# Altium PCB ControlBoard_v4.PcbDoc (part 1 of 2)
Units mm, origin at the board's own origin, x right, y up, seen from the top; angles counter-clockwise.
Board outline 111.5 x 182 mm, 2 copper layers (Top Layer, Bottom Layer); 154 components, 123 nets, 669 pads, 187 vias.
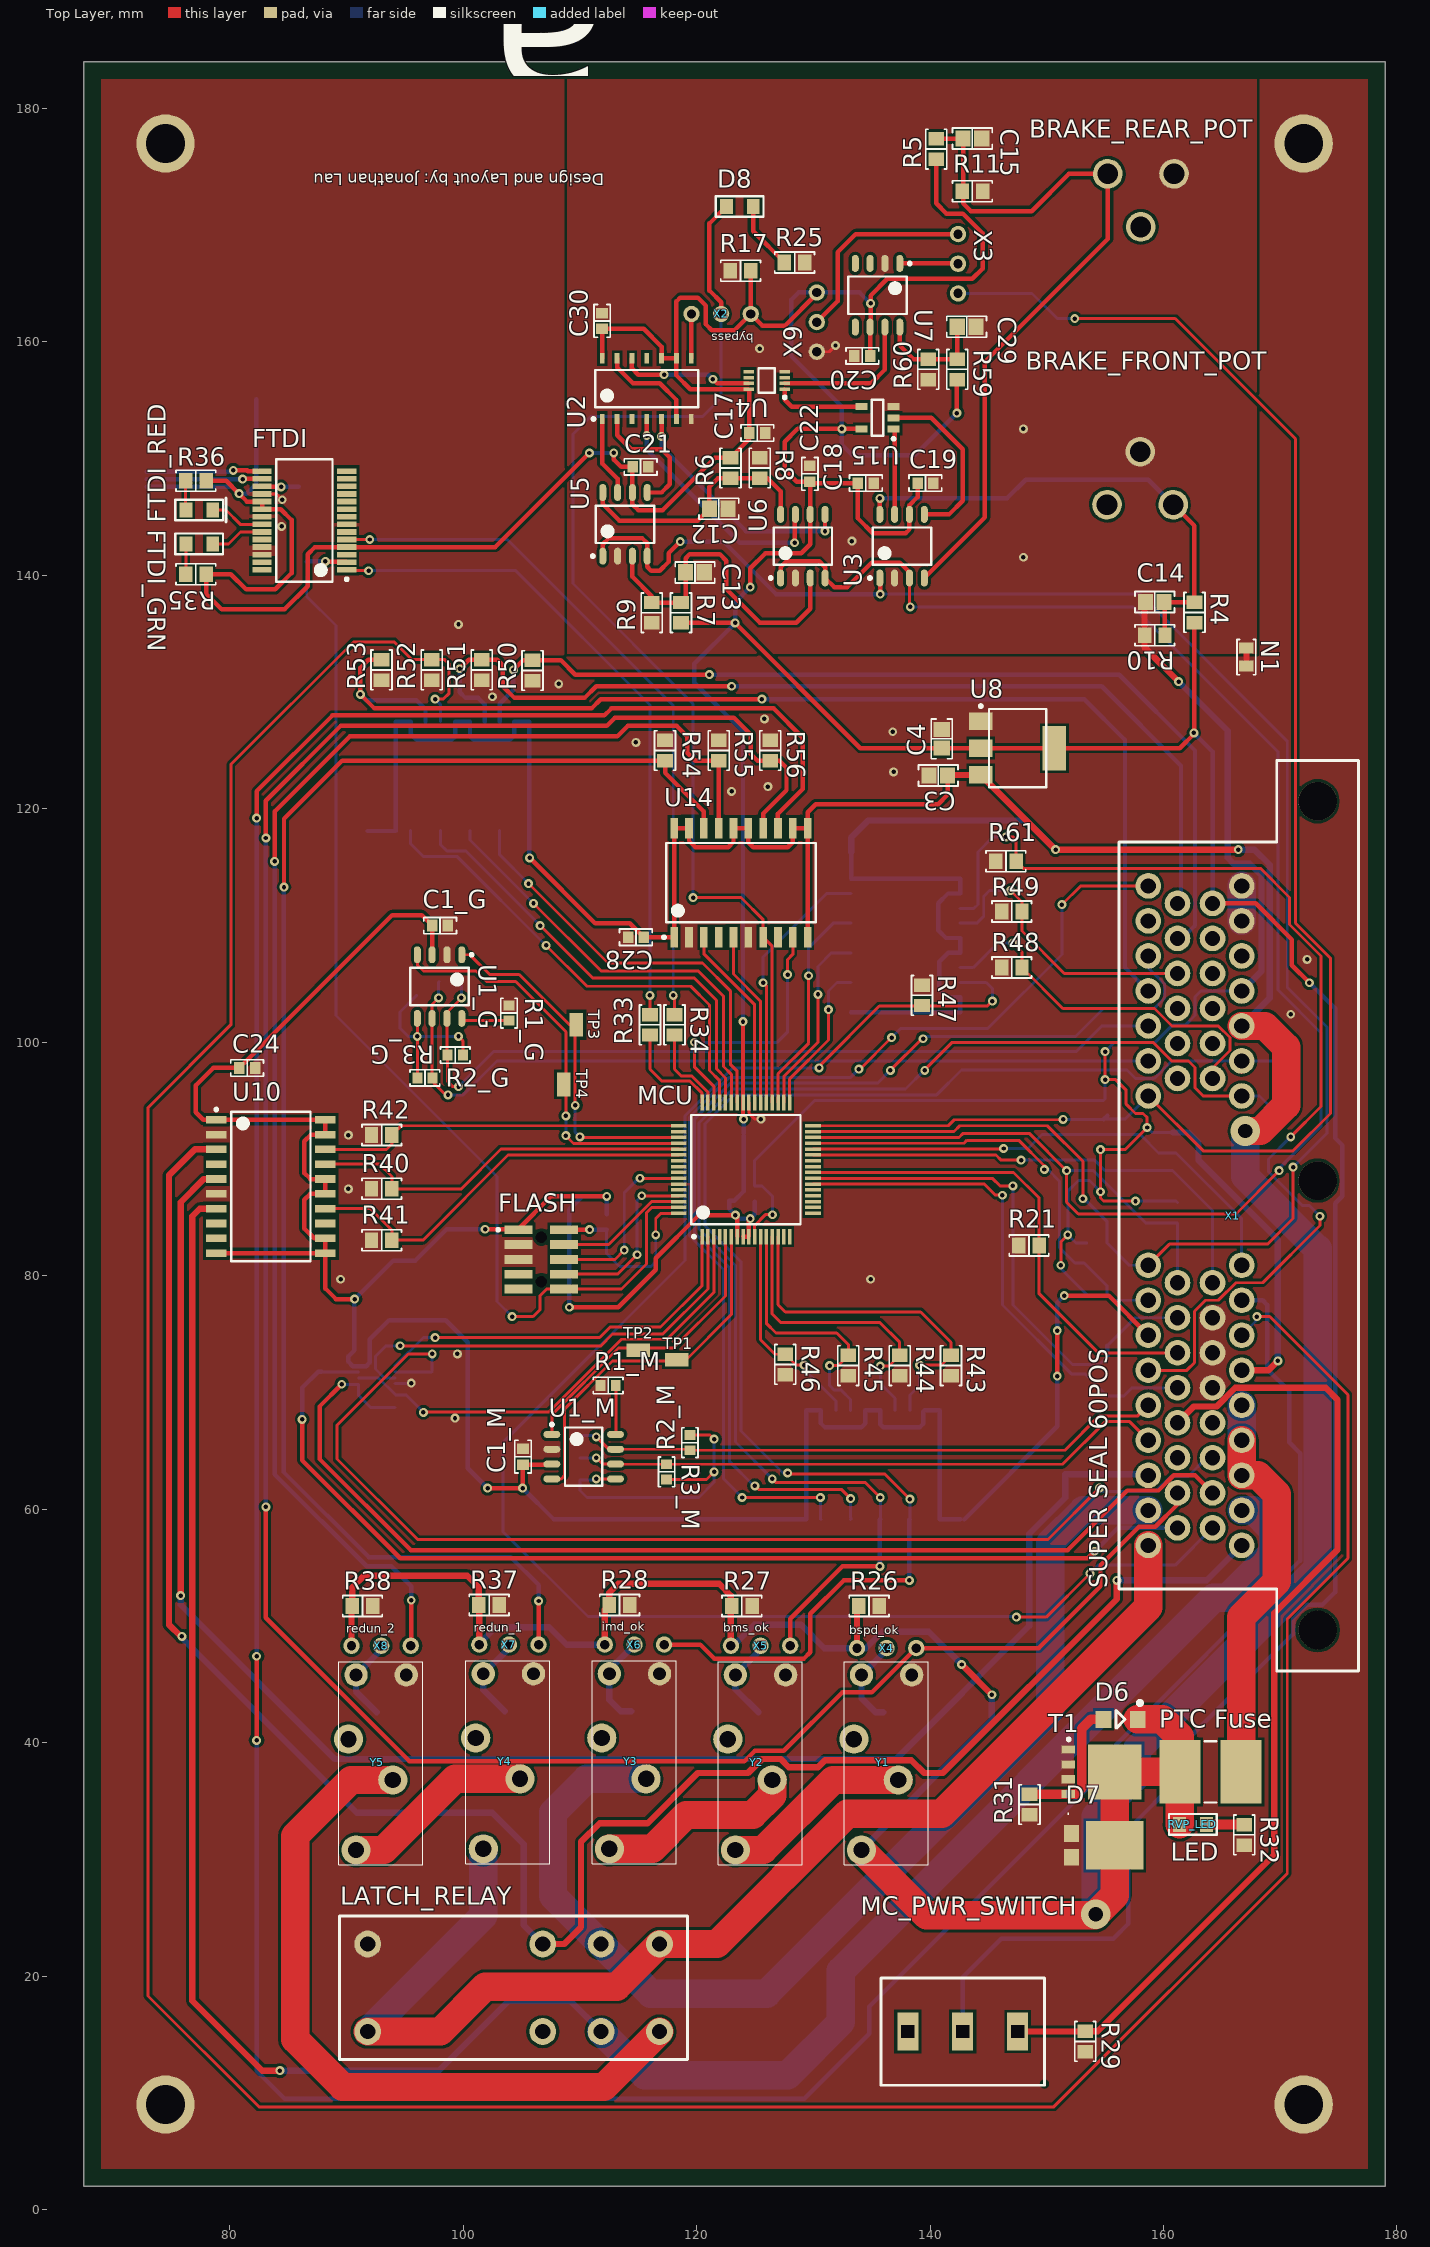
[diagram p0: Top Layer view]
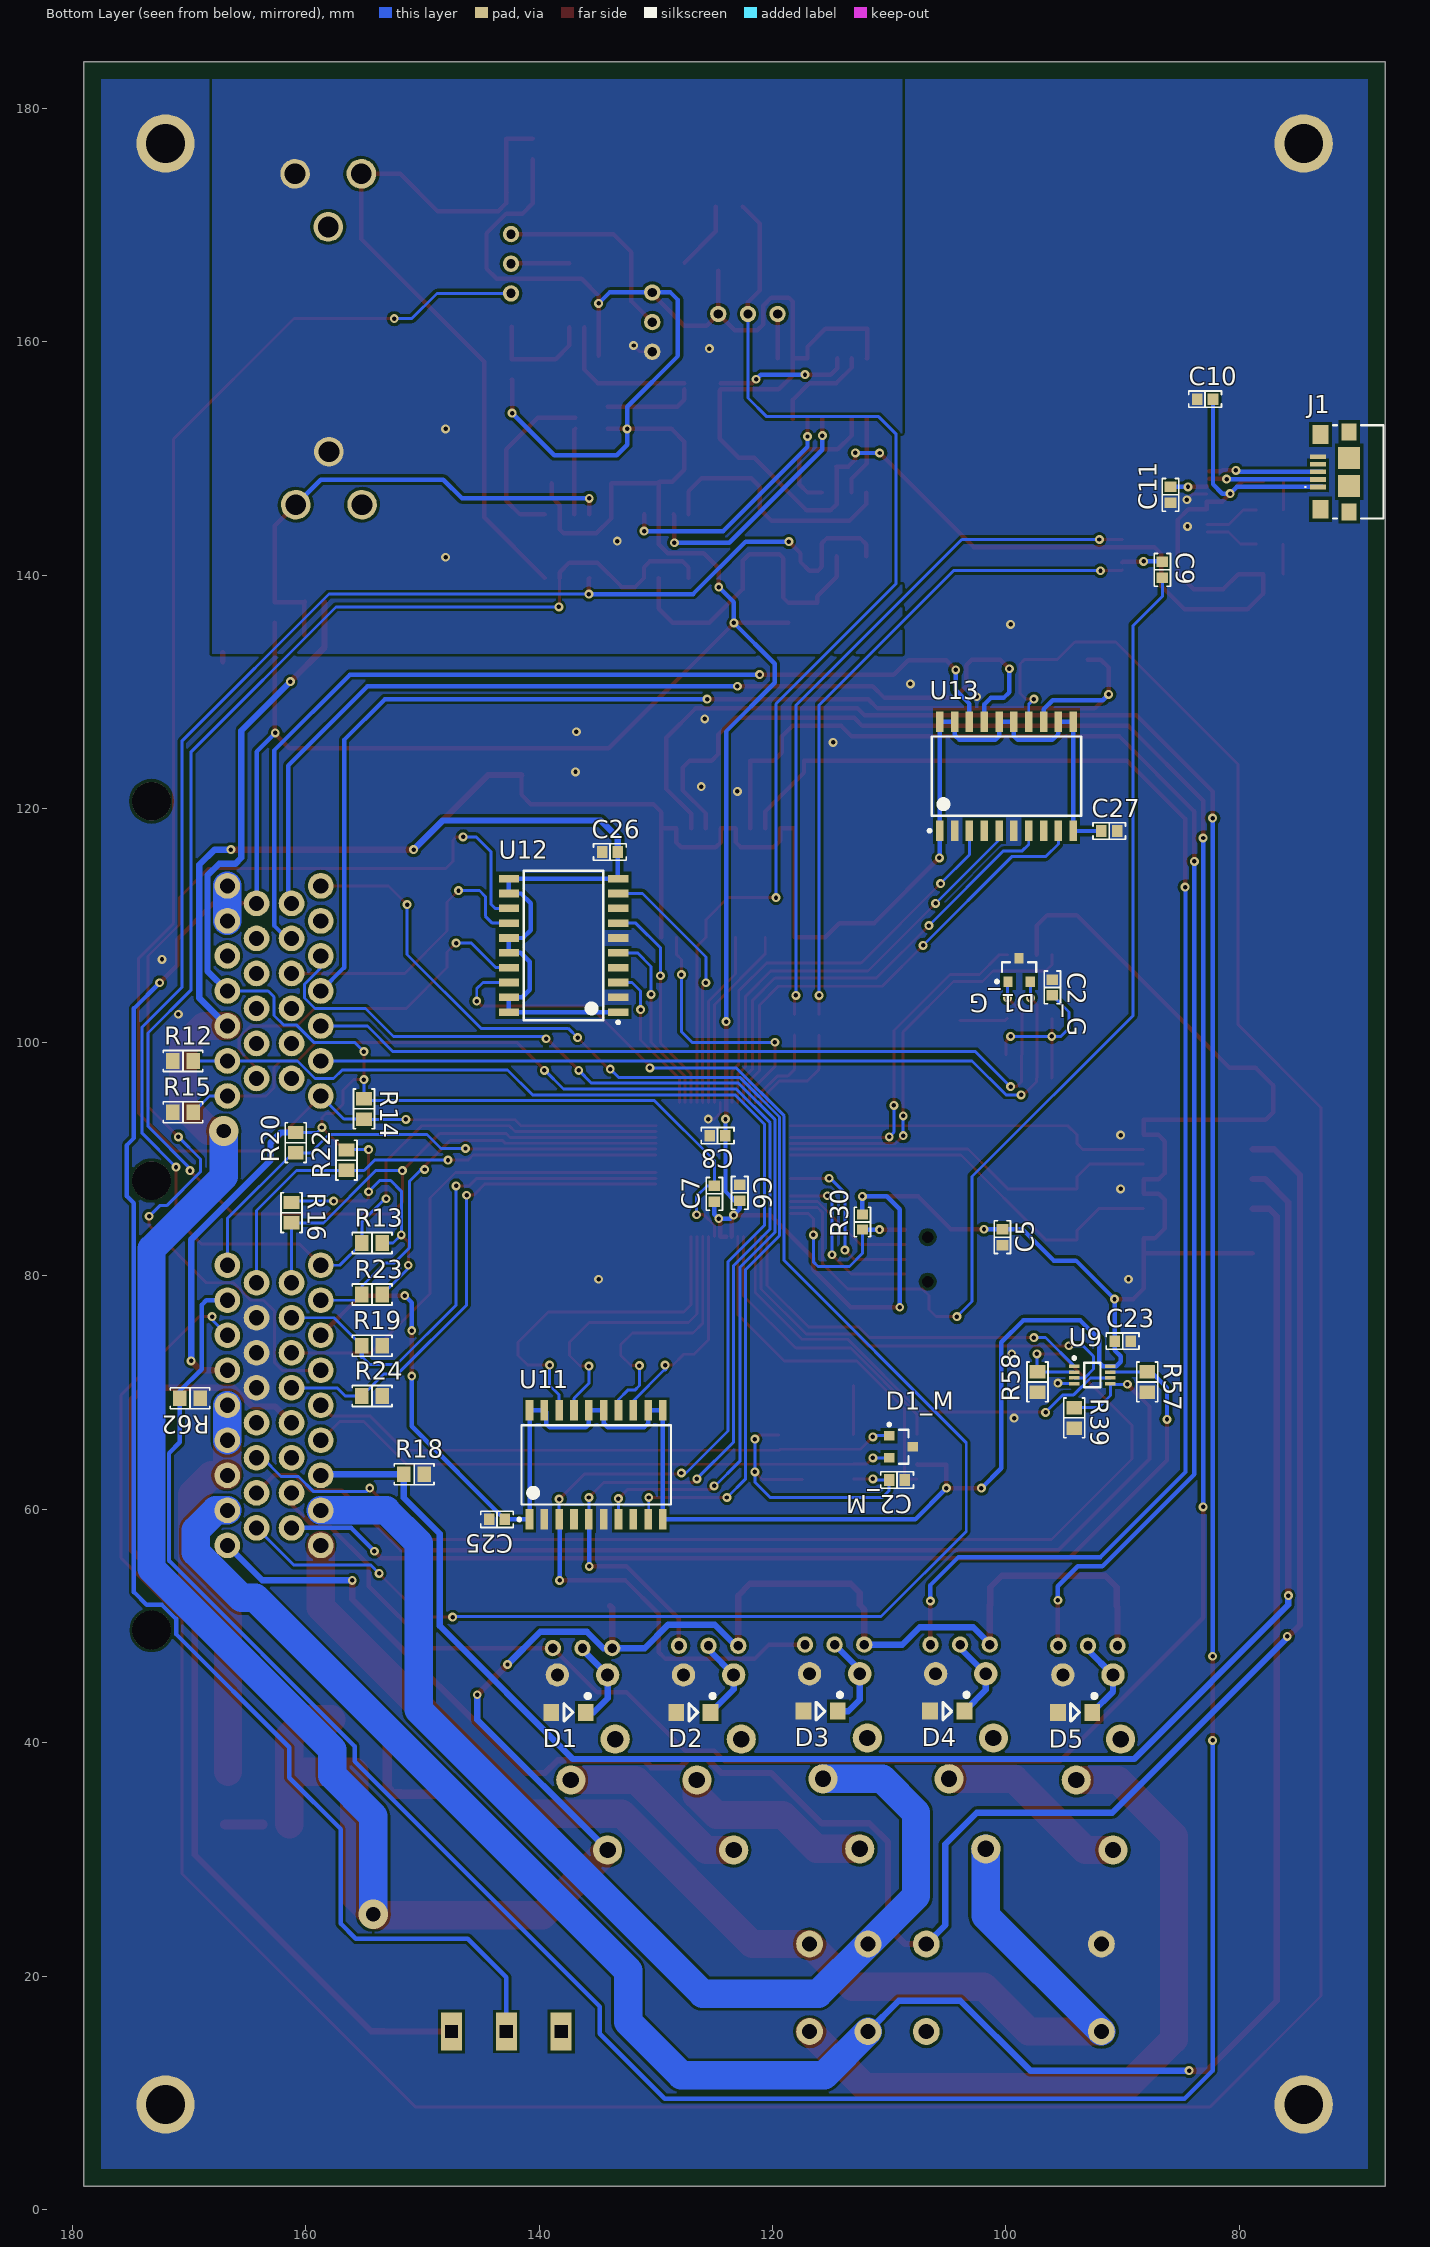
[diagram p1: Bottom Layer view, seen from below]
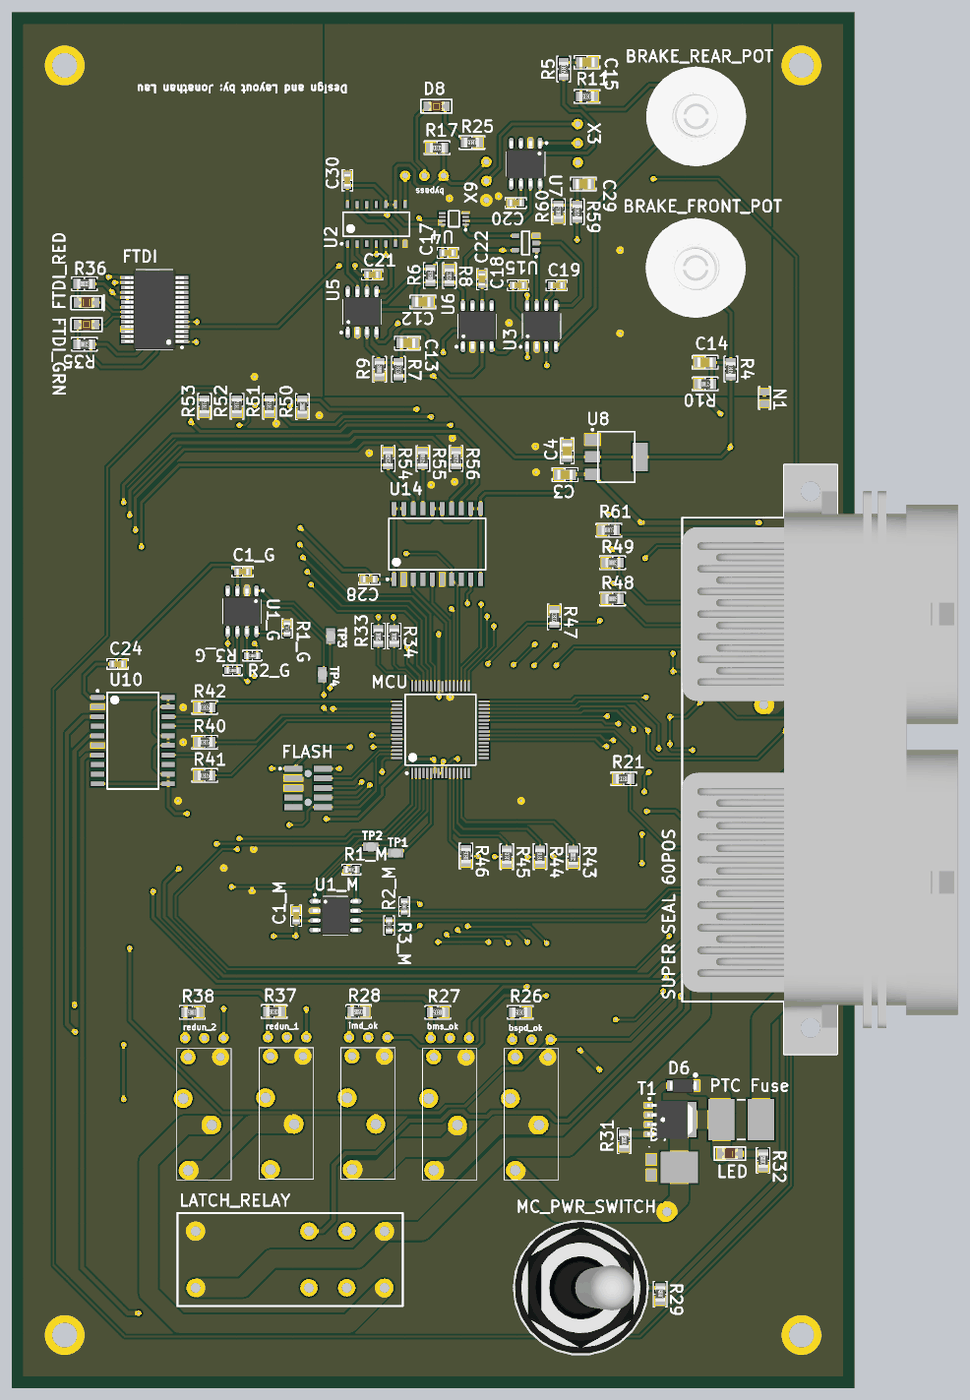
[diagram p3: 3D render of the assembled board from above, using the file's embedded part models]
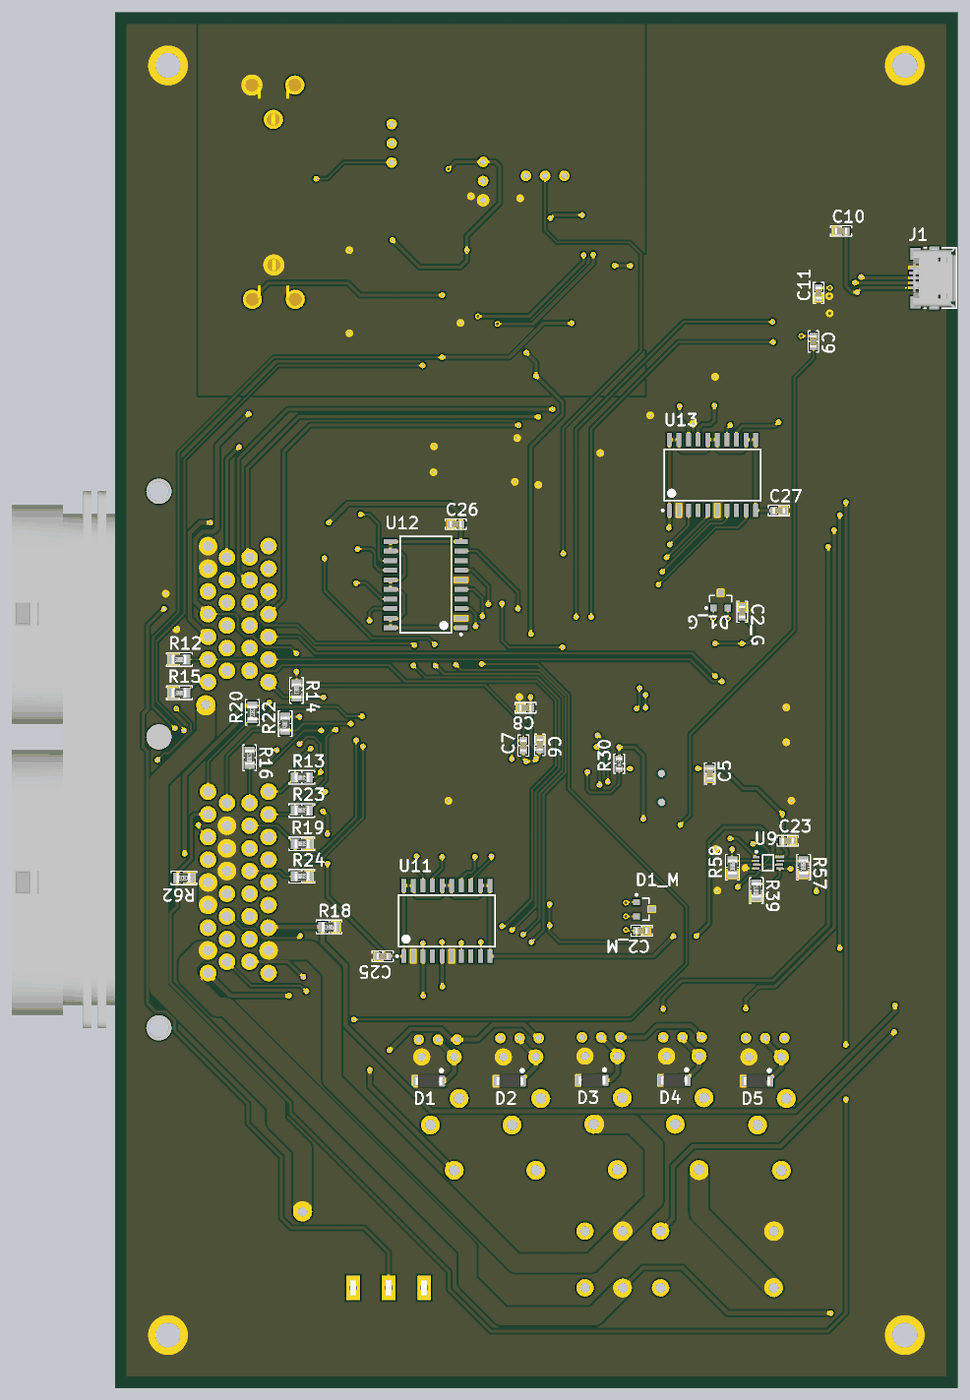
[diagram p4: 3D render of the assembled board from below, using the file's embedded part models]

## Layer stack, top to bottom
Top Solder: solder mask 0.0102, Solder Resist, Dk 3.5
Top Layer: signal copper 0.0356
Dielectric 1: dielectric 0.32, FR-4, Dk 4.8
Bottom Layer: signal copper 0.0356
Bottom Solder: solder mask 0.0102, Solder Resist, Dk 3.5

## Board outline
67.5,2 179,2 179,184 67.5,184

## Design rules (kind name [scope] priority, off if disabled: settings)
Clearance Clearance_12 [InNamedPolygon('AGND_TOP')] p1: gap=0.255 ignorepadtopadclearanceinfootprint=FALSE
Clearance Clearance_11 [InNamedPolygon('AGND_BOT')] p2: gap=0.255 ignorepadtopadclearanceinfootprint=FALSE
Clearance Clearance_10 [InNamedPolygon('AGND_TOP')] p3: gap=0.254 ignorepadtopadclearanceinfootprint=FALSE
Clearance Clearance_9 [InNamedPolygon('AGND_TOP')] p4: gap=0.254 ignorepadtopadclearanceinfootprint=FALSE except(0: Arc-Hole Track-Hole SMDPad-Hole THPad-Hole Via-Hole Fill-Hole Poly-Hole Region-Hole Text-Hole)
Clearance Clearance_8 [InNamedPolygon('AGND_BOT')] p5: gap=0.254 ignorepadtopadclearanceinfootprint=FALSE
Clearance Clearance_7 [InNamedPolygon('DGND_TOP')] p6: gap=0.254 ignorepadtopadclearanceinfootprint=FALSE
Clearance Clearance_6 [InNamedPolygon('DGND_BOT')] p7: gap=0.254 ignorepadtopadclearanceinfootprint=FALSE
Clearance Clearance_5 [InNamedPolygon('AGND_TOP')] p8: gap=0.254 ignorepadtopadclearanceinfootprint=FALSE
Clearance Clearance_4 [InNamedPolygon('AGND_BOT')] p9: gap=0.254 ignorepadtopadclearanceinfootprint=FALSE
Clearance Clearance_3 [InNamedPolygon('AGND_BOT')] p10: gap=0.254 ignorepadtopadclearanceinfootprint=FALSE except(0: Arc-Hole Track-Hole SMDPad-Hole THPad-Hole Via-Hole Fill-Hole Poly-Hole Region-Hole Text-Hole)
Clearance Clearance_2 [InNamedPolygon('AGND_BOT')] p11: gap=0.254 ignorepadtopadclearanceinfootprint=FALSE except(0: Arc-Hole Track-Hole SMDPad-Hole THPad-Hole Via-Hole Fill-Hole Poly-Hole Region-Hole Text-Hole)
Clearance Clearance_1 [InNamedPolygon('AGND_BOT')] p12: gap=0.254 ignorepadtopadclearanceinfootprint=FALSE except(0: Arc-Hole Track-Hole SMDPad-Hole THPad-Hole Via-Hole Fill-Hole Poly-Hole Region-Hole Text-Hole)
Clearance [InNetClass('All Nets')] p13: gap=0.006 ignorepadtopadclearanceinfootprint=FALSE
DiffPairsRouting [All] p1: maxlimit=0.254 minlimit=0.254 mostfreqgap=0.254 toplayer_minwidth=0.381 toplayer_maxwidth=0.381 toplayer_prefwidth=0.381 bottomlayer_minwidth=0.381 bottomlayer_maxwidth=0.381 bottomlayer_prefwidth=0.381 maxuncoupledlength=12.7
FabricationTestPointUsage TestPointUsage [All] p1: valid=0 allowmultiple=FALSE
FabricationTestpoint Testpoint [All] p1: side=3 testpointundercomponent=TRUE minsize=1.016 maxsize=2.54 preferedsize=1.524 minholesize=0.508 maxholesize=1.016 preferedholesize=0.813 testpointgrid=0.025 allowsidetop=TRUE allowsidebottom=TRUE usegrid=TRUE gridtolerance=0
Height [All] p1: minheight=0 maxheight=42 prefheight=12.7
HoleSize [All] p1: absolutevalues=TRUE maxlimit=6.274 minlimit=0.254 maxpercent=80.000 minpercent=20.000
PasteMaskExpansion PasteMaskExpansion_1 [InComponent('P1')] p1: expansion=-3.81
PasteMaskExpansion [All] p2: expansion=0
PlaneClearance [All] p1: clearance=0.543
PlaneConnect [All] p1: planeconnectstyle=Relief reliefexpansion=0.381 reliefentries=4 reliefconductorwidth=0.254 reliefairgap=0.254
PolygonConnect PolygonConnect_4 [All vs IsNamedPolygon('DGND_TOP')] p1: connectstyle=Direct reliefconductorwidth=0.254 reliefentries=4 polygonreliefangle="90 Angle" airgapwidth=0.254
PolygonConnect PolygonConnect_3 [All vs IsNamedPolygon('DGND_BOT')] p2: connectstyle=Direct reliefconductorwidth=0.254 reliefentries=4 polygonreliefangle="90 Angle" airgapwidth=0.254
PolygonConnect PolygonConnect_2 [All vs IsNamedPolygon('AGND_TOP')] p3: connectstyle=Direct reliefconductorwidth=0.254 reliefentries=4 polygonreliefangle="90 Angle" airgapwidth=0.254
PolygonConnect PolygonConnect_1 [All vs IsNamedPolygon('AGND_BOT')] p4: connectstyle=Direct reliefconductorwidth=0.254 reliefentries=4 polygonreliefangle="90 Angle" airgapwidth=0.254
PolygonConnect [All] p5: connectstyle=Relief reliefconductorwidth=0.254 reliefentries=4 polygonreliefangle="90 Angle" airgapwidth=0.254
RoutingVias [All] p1: holewidth=0.381 width=0.762 viastyle="Through Hole" minholewidth=0.254 minwidth=0.508 maxholewidth=2.55 maxwidth=2.55
SilkToSolderMaskClearance SilkscreenOverComponentPads [IsPad] p1: minsilkscreentomaskgap=0.254 clearancetoexposedcopper=TRUE
SolderMaskExpansion [All] p1: expansion=0.127
UnRoutedNet [All] p1: checkbadconnections=TRUE
Width [All] p1: maxlimit=3.81 minlimit=0.254 preferedwidth=0.254 minimp=50.000000 maximp=50.000000 favimp=50.000000
20 further rules are at their usual default settings.

## Classes and differential pairs
component class MCU_MKE185F512VLH16: C5 C6 C7 C8 FLASH MCU R30 TP1 TP2 TP3 TP4
component class MC_power_en: MC_PWR_SWITCH R29
component class LDO_5V: C3 C4 U8
component class Designator: D6 D7 "PTC Fuse" R31 R32 RVP_LED T1
component class Connector: R12 R13 R14 R15 R16 R18 R19 R20 R21 R22 R23 R24 X1
component class BSPD: BRAKE_FRONT_POT BRAKE_REAR_POT C12 C13 C14 C15 C17 C18 C19 C20 C21 C22 C29 C30 D8 R4 R5 R6 R7 R8 R9 R10 R11 R17 R25 R59 R60 U2 U3 U4 U5 U6 U7 U15 X2 X3 X9
component class 12V_out_driver: C26 C27 C28 R47 R48 R49 R50 R51 R52 R53 R54 R55 R56 R61 R62 U12 U13 U14
component class 5V_out_driver: C23 C24 C25 R39 R40 R41 R42 R43 R44 R45 R46 R57 R58 U9 U10 U11
channel class CAN_Tranceiver: GEN MC
component class USB: C9 C10 C11 FTDI FTDI_GRN FTDI_RED J1 R33 R34 R35 R36
component class MC: C1_M C2_M D1_M R1_M R2_M R3_M U1_M
component class GEN: C1_G C2_G D1_G R1_G R2_G R3_G U1_G
component class Shutdown: D1 D2 D3 D4 D5 LATCH_RELAY R26 R27 R28 R37 R38 X4 X5 X6 X7 X8 Y1 Y2 Y3 Y4 Y5
differential pair D: +D_P -D_N

## Components (designator, comment, footprint, x,y, rotation, side; value= is the part's Value field where it differs from the comment)
BRAKE_FRONT_POT "RV6LAYSA502A" RV6LAYSA502A 158,148.924 r0 top value="100-5M Ohms"
BRAKE_REAR_POT "RV6LAYSA502A" RV6LAYSA502A 158.06,171.531 r180 top value="100-5M Ohms"
C1_G "Capacitor MLCC 0.10uf 50V CAP 0603/1608" "CAP 0603/1608" 98.025,110 r180 top value=0.10uf (schematic designator C1)
C1_M "Capacitor MLCC 0.10uf 50V CAP 0603/1608" "CAP 0603/1608" 105.125,64.5 r270 top value=0.10uf (schematic designator C1)
C2_G "Capacitor MLCC 4700pf 50V CAP 0603/1608" "CAP 0603/1608" 96.025,104.7 r270 bottom value=4700pf (schematic designator C2)
C2_M "Capacitor MLCC 4700pf 50V CAP 0603/1608" "CAP 0603/1608" 109.325,62.5 r0 bottom value=4700pf (schematic designator C2)
C3 "Capacitor MLCC 10uf 16V CAP 0805/2012" "CAP 0805/2012" 140.7,122.855 r0 top value=10uf
C4 "Capacitor MLCC 10uf 16V CAP 0805/2012" "CAP 0805/2012" 141,126 r270 top value=10uf
C5 "Capacitor MLCC 0.10uf 16V CAP 0603/1608" "CAP 0603/1608" 100.3,83.305 r90 bottom value=0.10uf
C6 "Capacitor MLCC 0.10uf 25V CAP 0603/1608" "CAP 0603/1608" 122.8,87.1 r270 bottom value=0.10uf
C7 "Capacitor MLCC 0.10uf 25V CAP 0603/1608" "CAP 0603/1608" 124.975,87.015 r270 bottom value=0.10uf
C8 "Capacitor MLCC 100pf 25V CAP 0603/1608" "CAP 0603/1608" 124.7,92 r180 bottom value=100pf
C9 "Capacitor MLCC 0.10uf 25V CAP 0603/1608" "CAP 0603/1608" 86.6,140.475 r270 bottom value=0.10uf
C10 "Capacitor MLCC 0.10uf 25V CAP 0603/1608" "CAP 0603/1608" 82.935,155.1 r180 bottom value=0.10uf
C11 "Capacitor MLCC 0.10uf 25V CAP 0603/1608" "CAP 0603/1608" 85.9,146.9 r90 bottom value=0.10uf
C12 "Capacitor MLCC 0.10uf 16V CAP 0805/2012" "CAP 0805/2012" 121.9,145.7 r180 top value=0.10uf
C13 "Capacitor MLCC 0.10uf 16V CAP 0805/2012" "CAP 0805/2012" 119.86,140.255 r180 top value=0.10uf
C14 "Capacitor MLCC 0.10uf 16V CAP 0805/2012" "CAP 0805/2012" 159.25,137.724 r0 top value=0.10uf
C15 "Capacitor MLCC 0.10uf 16V CAP 0805/2012" "CAP 0805/2012" 143.625,177.425 r180 top value=0.10uf
C17 "Capacitor MLCC 1.0uf 16V CAP 0603/1608" "CAP 0603/1608" 125.2,152.2 r180 top value=1.0uf
C18 "Capacitor MLCC 1.0uf 16V CAP 0603/1608" "CAP 0603/1608" 134.5,147.9 r180 top value=1.0uf
C19 "Capacitor MLCC 1.0uf 16V CAP 0603/1608" "CAP 0603/1608" 139.6,147.9 r180 top value=1.0uf
C20 "Capacitor MLCC 1.0uf 16V CAP 0603/1608" "CAP 0603/1608" 134.2,158.8 r0 top value=1.0uf
C21 "Capacitor MLCC 1.0uf 16V CAP 0603/1608" "CAP 0603/1608" 115.2,149.3 r180 top value=1.0uf
C22 "Capacitor MLCC 1.0uf 16V CAP 0603/1608" "CAP 0603/1608" 129.7,148.7 r270 top value=1.0uf
C23 "Capacitor MLCC 1.0uf 16V CAP 0603/1608" "CAP 0603/1608" 90,74.4 r0 bottom value=1.0uf
C24 "Capacitor MLCC 10uf 16V CAP 0603/1608" "CAP 0603/1608" 81.5,97.8 r0 top value=10uf
C25 "Capacitor MLCC 10uf 16V CAP 0603/1608" "CAP 0603/1608" 143.6,59.125 r0 bottom value=10uf
C26 "Capacitor MLCC 10uf 16V CAP 0603/1608" "CAP 0603/1608" 133.925,116.3 r180 bottom value=10uf
C27 "Capacitor MLCC 10uf 16V CAP 0603/1608" "CAP 0603/1608" 91.15,118.1 r0 bottom value=10uf
C28 "Capacitor MLCC 10uf 16V CAP 0603/1608" "CAP 0603/1608" 114.8,109 r0 top value=10uf
C29 "Capacitor MLCC 0.10uf 16V CAP 0805/2012" "CAP 0805/2012" 143.135,161.31 r180 top value=0.10uf
C30 "Capacitor MLCC 1.0uf 16V CAP 0603/1608" "CAP 0603/1608" 111.9,161.8 r270 top value=1.0uf
D1 "DIODE" SOD123F 137.475,42.6 r180 bottom
D1_G "NUP1105LT1G" "SOT-23 (TO-236)" 98.875,106.2 r90 bottom value=TVS_24V (schematic designator D1)
D1_M "NUP1105LT1G" "SOT-23 (TO-236)" 109,65.35 r180 bottom value=TVS_24V (schematic designator D1)
D2 "DIODE" SOD123F 126.775,42.6 r180 bottom
D3 "DIODE" SOD123F 115.875,42.7 r180 bottom
D4 "DIODE" SOD123F 105.025,42.7 r180 bottom
D5 "DIODE" SOD123F 94.075,42.6 r180 bottom
D6 "DDZ9701-7" SOD123F 156.325,42 r0 top value=14Vz
D7 "DIODE_2A1K" TO-277 154.912,31.2 r0 top value="20 A"
D8 "LED" 0805_LED 123.7,171.6 r0 top value=Green
FLASH "CN-2P-M-R10" HDR2X5_SMT 106.7,81.4 r270 top value=CONN
FTDI "FT232RL" SSOP-28 86.4,144.7 r180 top
FTDI_GRN "LED" 0805_LED 77.4,142.7 r0 top value=Green (schematic designator GRN)
FTDI_RED "LED" 0805_LED 77.4,145.6 r0 top value=Red (schematic designator RED)
J1 "USB-5-6SHLD" TECO-1981568-5_V 73.275,148.87 r90 bottom value=CONN
LATCH_RELAY "JW2SN-DC12V-Relay" JW2SN-DC12V-Relay 104.375,19 r180 top
MC_PWR_SWITCH "SPST" M2011SS1W01/UC 142.8,15.25 r90 top
MCU "MKE18F512 VLH16 MCU" TQFP64 124.225,89.1 r90 top
N1 "Net_Tie" Net_Tie 167.1,132.997 r90 top
"PTC Fuse" "PTC Fuse" "PTC Fuse 2920/07351" 164.025,37.5 r180 top value="2A hold, 4A trip, 40A max"
R1_G "Resistor 100 0603 1/10W 10%" "RES 0603/1608" 103.925,102.5 r270 top value=100 (schematic designator R1)
R1_M "Resistor 100 0603 1/10W 10%" "RES 0603/1608" 112.425,70.6 r0 top value=100 (schematic designator R1)
R2_G "Resistor 62 0603 1/10W 5%" "RES 0603/1608" 96.725,96.95 r180 top value=62 (schematic designator R2)
R2_M "Resistor 62 0603 1/10W 5%" "RES 0603/1608" 117.425,63.2 r270 top value=62 (schematic designator R2)
R3_G "Resistor 62 0603 1/10W 5%" "RES 0603/1608" 99.325,98.9 r180 top value=62 (schematic designator R3)
R3_M "Resistor 62 0603 1/10W 5%" "RES 0603/1608" 119.425,65.7 r270 top value=62 (schematic designator R3)
R4 "Resistor 51k 0805 1/4W 5%" "RES 0805/2012" 162.65,136.824 r270 top value=51k
R5 "Resistor 51k 0805 1/4W 5%" "RES 0805/2012" 140.525,176.525 r270 top value=51k
R6 "Resistor 18k 0805 1/4W 5%" "RES 0805/2012" 122.9,149.2 r90 top value=18k
R7 "Resistor 2.0k 0805 1/4W 5%" "RES 0805/2012" 118.665,136.8 r270 top value=2.0k
R8 "Resistor 2.0k 0805 1/4W 5%" "RES 0805/2012" 125.4,149.2 r270 top value=2.0k
R9 "Resistor 18k 0805 1/4W 5%" "RES 0805/2012" 116.165,136.8 r90 top value=18k
R10 "Resistor 51k 0805 1/4W 5%" "RES 0805/2012" 159.25,134.874 r0 top value=51k
R11 "Resistor 51k 0805 1/4W 5%" "RES 0805/2012" 143.625,172.9 r180 top value=51k
R12 "Resistor 47k 0805 1/10W 1%" "RES 0805/2012" 170.5,98.4 r0 bottom value=47k
R13 "Resistor 47k 0805 1/10W 5%" "RES 0805/2012" 154.3,82.8 r180 bottom value=47k
R14 "Resistor 47k 0805 1/10W 5%" "RES 0805/2012" 155,94.3 r270 bottom value=47k
R15 "Resistor 47k 0805 1/10W 1%" "RES 0805/2012" 170.5,94 r0 bottom value=47k
R16 "Resistor 47k 0805 1/10W 5%" "RES 0805/2012" 161.2,85.4 r90 bottom value=47k
R17 "Resistor 47k 0805 1/4W 5%" "RES 0805/2012" 123.765,166.1 r0 top value=47k
R18 "Resistor 47k 0805 1/10W 1%" "RES 0805/2012" 150.7,63 r180 bottom value=47k
R19 "Resistor 47k 0805 1/10W 5%" "RES 0805/2012" 154.3,74 r180 bottom value=47k
R20 "Resistor 47k 0805 1/10W 5%" "RES 0805/2012" 160.84,91.4 r270 bottom value=47k
R21 "Resistor 47k 0805 1/10W 5%" "RES 0805/2012" 148.475,82.6 r180 top value=47k
R22 "Resistor 47k 0805 1/10W 5%" "RES 0805/2012" 156.5,89.9 r270 bottom value=47k
R23 "Resistor 47k 0805 1/10W 5%" "RES 0805/2012" 154.3,78.4 r180 bottom value=47k
R24 "Resistor 47k 0805 1/10W 5%" "RES 0805/2012" 154.3,69.7 r180 bottom value=47k
R25 "Resistor 240 0805 1/4W 1%" "RES 0805/2012" 128.4,166.8 r180 top value=240
R26 "Resistor 47k 0805 1/4W 5%" "RES 0805/2012" 134.775,51.7 r180 top value=47k
R27 "Resistor 47k 0805 1/4W 5%" "RES 0805/2012" 123.875,51.7 r180 top value=47k
R28 "Resistor 47k 0805 1/4W 5%" "RES 0805/2012" 113.4,51.8 r180 top value=47k
R29 "Resistor 47k 0805 1/4W 10%" "RES 0805/2012" 153.3,14.4 r90 top value=47k
R30 "Resistor 10k 0603 1/10W 1%" "RES 0603/1608" 112.3,84.6 r90 bottom value=10k
R31 "Resistor 47k 0805 1/10W 1%" "RES 0805/2012" 148.525,34.7 r90 top value=47k
R32 "Resistor 470 0805 1/10W 1%" "RES 0805/2012" 166.925,32.1 r90 top value=470
R33 "Resistor 1.0k 0805 1/4W 1%" "RES 0805/2012" 116,101.5 r270 top value=1.0k
R34 "Resistor 1.0k 0805 1/4W 1%" "RES 0805/2012" 118.1,101.5 r270 top value=1.0k
R35 "Resistor 1.0k 0805 1/4W 1%" "RES 0805/2012" 77.1,140.1 r0 top value=1.0k
R36 "Resistor 1.0k 0805 1/4W 1%" "RES 0805/2012" 77.1,148.1 r0 top value=1.0k
R37 "Resistor 47k 0805 1/4W 5%" "RES 0805/2012" 102.225,51.8 r180 top value=47k
R38 "Resistor 47k 0805 1/4W 5%" "RES 0805/2012" 91.375,51.7 r180 top value=47k
R39 "Resistor 47k 0805 1/4W 5%" "RES 0805/2012" 94.15,67.825 r90 bottom value=47k
R40 "Resistor 47k 0805 1/4W 5%" "RES 0805/2012" 93.025,87.45 r0 top value=47k
R41 "Resistor 47k 0805 1/4W 5%" "RES 0805/2012" 93.025,83.05 r0 top value=47k
R42 "Resistor 47k 0805 1/4W 5%" "RES 0805/2012" 93.025,92.05 r0 top value=47k
R43 "Resistor 47k 0805 1/4W 5%" "RES 0805/2012" 141.8,72.3 r270 top value=47k
R44 "Resistor 47k 0805 1/4W 5%" "RES 0805/2012" 137.4,72.3 r90 top value=47k
R45 "Resistor 47k 0805 1/4W 5%" "RES 0805/2012" 133,72.3 r90 top value=47k
R46 "Resistor 47k 0805 1/4W 5%" "RES 0805/2012" 127.6,72.4 r90 top value=47k
R47 "Resistor 47k 0805 1/4W 5%" "RES 0805/2012" 139.3,104.025 r270 top value=47k
R48 "Resistor 47k 0805 1/4W 5%" "RES 0805/2012" 147,106.4 r0 top value=47k
R49 "Resistor 47k 0805 1/4W 5%" "RES 0805/2012" 147,111.2 r0 top value=47k
R50 "Resistor 47k 0805 1/4W 5%" "RES 0805/2012" 105.95,131.85 r90 top value=47k
R51 "Resistor 47k 0805 1/4W 5%" "RES 0805/2012" 101.6,131.9 r90 top value=47k
R52 "Resistor 47k 0805 1/4W 5%" "RES 0805/2012" 97.3,131.9 r90 top value=47k
R53 "Resistor 47k 0805 1/4W 5%" "RES 0805/2012" 93,131.9 r90 top value=47k
R54 "Resistor 47k 0805 1/4W 5%" "RES 0805/2012" 117.3,125 r270 top value=47k
R55 "Resistor 47k 0805 1/4W 5%" "RES 0805/2012" 121.9,125 r270 top value=47k
R56 "Resistor 47k 0805 1/4W 5%" "RES 0805/2012" 126.3,125 r270 top value=47k
R57 "Resistor 47k 0805 1/4W 5%" "RES 0805/2012" 87.9,70.9 r90 bottom value=47k
R58 "Resistor 47k 0805 1/4W 5%" "RES 0805/2012" 97.3,70.9 r90 bottom value=47k
R59 "Resistor 9.1k 0805 1/4W 1%" "RES 0805/2012" 142.335,157.65 r270 top value=9.1k
R60 "Resistor 11k 0805 1/4W 1%" "RES 0805/2012" 139.835,157.65 r90 top value=11k
R61 "Resistor 47k 0805 1/4W 5%" "RES 0805/2012" 146.5,115.5 r0 top value=47k
R62 "Resistor 47k 0805 1/4W 5%" "RES 0805/2012" 169.9,69.5 r0 bottom value=47k
RVP_LED "LED" 0805_LED 162.525,33 r0 top value=Green
T1 "PSMN2R2-25YLC 25V Logic Level MOSFET" LFPAK-SO8 154.525,37.5 r0 top value=N_Channel
TP1 "RCU-0C" RCU-0C 118.3,72.8 r270 top
TP2 "RCU-0C" RCU-0C 115,73.6 r270 top
TP3 "RCU-0C" RCU-0C 109.7,101.5 r180 top
TP4 "RCU-0C" RCU-0C 108.6,96.4 r0 top
U1_G "MCP2561 CAN Transceiver" SOIC-8 97.975,104.775 r270 top value=CAN/UART (schematic designator U1)
U1_M "MCP2561 CAN Transceiver" SOIC-8 110.325,64.5 r0 top value=CAN/UART (schematic designator U1)
U2 "74HC21D AND Gate" SOT108-1 115.73,156 r90 top
U3 "LT1018 Dual Comparator" SOIC-8 137.6,142.5 r90 top
U4 "SN74LVC2G132DCUR" R-PDSO-G8 126,156.7 r180 top
U5 "LT1018 Dual Comparator" SOIC-8 113.865,144.375 r90 top
U6 "LT1018 Dual Comparator" SOIC-8 129.1,142.5 r90 top
U7 "LT1018 Dual Comparator" SOIC-8 135.5,164 r270 top
U8 "NCP1117ST50T3G" SOT-223-3 147.5,125.2 r0 top value="5V 1.0A"
U9 "SN74LVC3G14DCUR" R-PDSO-G8 92.6,71.5 r180 bottom
U10 "PG-DSO-20" PG-DSO-20 83.525,87.65 r0 top
U11 "PG-DSO-20" PG-DSO-20 135.1,63.8 r90 bottom
U12 "PG-DSO-20" PG-DSO-20 137.9,108.3 r0 bottom
U13 "PG-DSO-20" PG-DSO-20 99.95,122.8 r90 bottom
U14 "PG-DSO-20" PG-DSO-20 123.795,113.675 r90 top
U15 "SN74LVC1G32 OR Gate" SOT23-5 135.5,153.5 r180 top
X1 "GENERAL" "SUPERSEAL 60POS 90Deg" 173.2,49.65 r90 top value=CONN
X2 "bypass" XG8V-0331 119.56,162.4 r0 top
X3 "XG8V-0331" XG8V-0331 142.4,164.16 r90 top
X4 "bspd_ok" XG8V-0331 138.815,48.1 r180 top
X5 "bms_ok" XG8V-0331 128.015,48.3 r180 top
X6 "imd_ok" XG8V-0331 117.215,48.4 r180 top
X7 "redun_1" XG8V-0331 106.465,48.4 r180 top
X8 "redun_2" XG8V-0331 95.515,48.3 r180 top
X9 "XG8V-0331" XG8V-0331 130.3,164.24 r270 top
Y1 "ACTP112" ACTP112 137.935,30.8 r90 top
Y2 "ACTP112" ACTP112 127.135,30.8 r90 top
Y3 "ACTP112" ACTP112 116.335,30.9 r90 top
Y4 "ACTP112" ACTP112 105.535,30.9 r90 top
Y5 "ACTP112" ACTP112 94.635,30.8 r90 top

## Footprints (in the part's own frame and the unit in brackets; to place one, negate y for a bottom-side part, rotate by r counter-clockwise, add the part's x,y. Pads: shape width x height; smd on the part's side, far side on the other; paste and mask are expansions set on the pad)
0805_LED [mm]
  rect 1.1x1.3 smd: 1(-1.15,0) 2(1.15,0)
  silkscreen extent -2.06,-0.89 2.03,0.89, body extent -1.05,-0.67 1.05,0.68, height 0.9
ACTP112 [mm] "ACTP112, 12V Relay"
  round 2 hole 1.1: COIL1(15,3.81) COIL2(15,-0.49)
  round 2.5 hole 1.4: COM(0,3.81) NC(9.5,4.46) NO(6,0.66)
  silkscreen extent -1.27,-1.91 16.13,5.3, body extent -1.27,-1.91 16.13,5.33, height 13.5
"CAP 0603/1608" [mm] "Chip Capacitor, 2-Leads, Body 1.60x0.80mm, IPC Medium Density"
  rect 0.9x1 smd: 1(-0.675,0) 2(0.675,0)
  silkscreen extent -1.4,-0.7 1.4,0.7, body extent -0.8,-0.41 0.8,0.41, height 0.82
"CAP 0805/2012" [mm] "Chip Capacitor, 2-Leads, Body 2.00x1.20mm, IPC Medium Density"
  rect 1.3x1.4 smd: 1(-0.8,0) 2(0.8,0)
  silkscreen extent -1.7,-0.9 1.7,0.9, body extent -1,-0.64 1,0.64, height 1.26
HDR2X5_SMT [mm] "Header, 10-Leads, Body 3.43x6.35mm, Pitch 1.27mm"
  rect 0.76x2.4 smd: 1(-2.54,-1.95) 2(-2.54,1.95) 3(-1.27,-1.95) 4(-1.27,1.95) 5(0,-1.95) 6(0,1.95) 7(1.27,-1.95) 8(1.27,1.95) 9(2.54,-1.95) 10(2.54,1.95)
  round 0 hole 1 unplated: MH1(-1.905,0) MH2(1.905,0)
  silkscreen extent -2.66,-3.82 -2.42,-3.57, body extent -3.18,-1.72 3.18,1.72, height 4.55
JW2SN-DC12V-Relay [mm] "JW2SN-DC12V"
  round 2.3 hole 1.3: 1(12.554,-3.75) 2(-2.446,-3.75) 3(-7.446,-3.75) 4(-12.446,-3.75) 5(-12.446,3.75) 6(-7.446,3.75) 7(-2.446,3.75) 8(12.554,3.75)
  silkscreen extent -14.86,-6.16 14.97,6.16, body extent -14.73,-6.1 14.86,6.1, height 20
LFPAK-SO8 [mm] "TO, 5-Pads, Body 5.15x5.86mm (max), IPC Low Density"
  rect 1.15x0.7 smd: 1(-2.7,1.905) 2(-2.7,0.635) 3(-2.7,-0.635) 4(-2.7,-1.905)
  rect 4.6x4.7 smd: mb(1.3,0)
  silkscreen extent -2.77,2.66 -2.52,2.9, body extent -2.95,-2.5 3.05,2.5, height 1.25
M2011SS1W01/UC [mm]
  rect 3.25x1.8 hole 1.1 square: 1(0,-4.7) 2(0,0) 3(0,4.7)
  Top Layer keep-out lines w0.254: -4.5,-7 -4.5,-7
  silkscreen extent -4.6,-7 4.6,7, body extent -9,-9 9,9, height 38.44
Net_Tie [mm] "Chip Resistor, 2-Leads, Body 2.00x1.25mm, IPC High Density"
  rect 0.95x1.25 smd: 1(-0.775,0) 2(0.775,0)
  Top Layer lines w0.5: -0.381,0 0.381,0
  silkscreen extent -1.5,-0.8 1.5,0.8
PG-DSO-20 [mm] "PG-DSO-20, 20-Leads, Body 12.70x7.50mm, Pitch 1.27mm, IPC Medium Density, BTS716G"
  rect 1.75x0.65 smd: 1(-4.675,5.715) 2(-4.675,4.445) 3(-4.675,3.175) 4(-4.675,1.905) 5(-4.675,0.635) 6(-4.675,-0.635) 7(-4.675,-1.905) 8(-4.675,-3.175) 9(-4.675,-4.445) 10(-4.675,-5.715) 11(4.675,-5.715) 12(4.675,-4.445) 13(4.675,-3.175) 14(4.675,-1.905) 15(4.675,-0.635) 16(4.675,0.635) 17(4.675,1.905) 18(4.675,3.175) 19(4.675,4.445) 20(4.675,5.715)
  silkscreen extent -4.8,-6.4 3.4,6.71, body extent -3.8,-6.4 3.8,6.4, height 2.65
"PTC Fuse 2920/07351" [mm] "Chip PTC Fuse, 2-Leads, Body 7.36x5.12mm, IPC Medium Density"
  rect 3.5x5.45 smd: 1(-2.625,0) 2(2.625,0)
  silkscreen extent -0.5,-2.62 0.5,2.63, body extent -3.99,-2.72 3.99,2.72, height 1.25
R-PDSO-G8 [mm] "TSSOP, 8-Leads, Body 2.00x2.30mm, Pitch 0.50mm, IPC Medium Density SN74LVC2G132"
  rect 0.9x0.3 smd: 1(-1.55,0.75) 2(-1.55,0.25) 3(-1.55,-0.25) 4(-1.55,-0.75) 5(1.55,-0.75) 6(1.55,-0.25) 7(1.55,0.25) 8(1.55,0.75)
  silkscreen extent -1.68,-1.05 0.7,1.57, body extent -1.1,-1.05 1.1,1.05, height 0.9
RCU-0C [mm]
  rect 1.15x2.05 smd: 1(0,0)
  body extent -0.6,-0.77 0.6,0.82, height 1.16
"RES 0603/1608" [mm] "Chip Resistor, 2-Leads, Body 1.60x0.80mm, IPC Medium Density"
  rect 0.85x0.95 smd: 1(-0.65,0) 2(0.65,0)
  silkscreen extent -1.27,-0.7 1.27,0.7, body extent -0.8,-0.4 0.8,0.4, height 0.45
"RES 0805/2012" [mm] "Chip Resistor, 2-Leads, Body 2.00x1.25mm, IPC Medium Density"
  rect 1.15x1.35 smd: 1(-0.875,0) 2(0.875,0)
  silkscreen extent -1.7,-0.9 1.7,0.9, body extent -0.95,-0.62 1.05,0.63, height 0.6
RV6LAYSA502A [mil] "5k Potentiometer"
  round 100 hole 70: 1(111.81,-112.94) 2(0,66) 3(-111.81,-112.94)
  body extent -260,-210 260,310, height 1361
SOD123F [mm] "SODFL, 2-Leads, Body 1.80x3.50mm, IPC Low Density"
  rect 1.35x1.45 smd: 1(-1.475,0) 2(1.475,0)
  silkscreen extent -0.38,-0.76 1.75,1.5, body extent -1.75,-0.95 1.75,0.95, height 1.15
SOIC-8 [mm] "SOIC, 8-Leads, Body 4.90x3.90mm, Pitch 1.27mm, IPC Medium Density"
  oval 1.45x0.6 smd: 1(-2.725,1.905) 2(-2.725,0.635) 3(-2.725,-0.635) 4(-2.725,-1.905) 5(2.725,-1.905) 6(2.725,-0.635) 7(2.725,0.635) 8(2.725,1.905)
  silkscreen extent -2.85,-2.5 1.6,2.88, body extent -3,-2.5 3,2.5, height 1.75
SOT23-5 [mm] "SOT23, 5-Leads, Body 2.90x2.80mm, Pitch 0.95mm, IPC Medium Density, LP5907-3.3"
  rect 1x0.6 smd: 1(-1.375,0.95) 2(-1.375,0) 3(-1.375,-0.95) 4(1.375,-0.95) 5(1.375,0.95)
  silkscreen extent -1.5,-1.55 0.5,1.92, body extent -0.88,-1.52 0.87,1.53, height 1.45
SOT108-1 [mm]
  rect 0.889x0.42 smd: 1(-2.6,3.81) 2(-2.6,2.54) 3(-2.6,1.27) 4(-2.6,0) 5(-2.6,-1.27) 6(-2.6,-2.54) 7(-2.6,-3.81) 8(2.6,-3.81) 9(2.6,-2.54) 10(2.6,-1.27) 11(2.6,0) 12(2.6,1.27) 13(2.6,2.54) 14(2.6,3.81)
  silkscreen extent -2.72,-4.4 1.6,4.69, body extent -2,-4.4 2,4.4, height 1.75
"SOT-23 (TO-236)" [mm]
  rect 0.9x0.8 smd: 1(-1,0.95) 2(-1,-0.95) 3(1,0)
  silkscreen extent -1.12,-1.46 0.65,2.03, body extent -0.65,-1.46 0.65,1.46, height 1.11
SOT-223-3 [mm] "SOT223127P600-8N, NCP1117STAT3G, MMBT4403-7-F"
  rect 2x1.5 smd: 1(-3.15,2.3) 2(-3.15,0) 3(-3.15,-2.3)
  rect 2x3.8 smd: THM(3.15,0)
  silkscreen extent -3.27,-3.35 2.45,3.72, body extent -1.85,-3.35 1.85,3.35, height 1.8
SSOP-28 [mm] "hi"
  rect 1.65x0.49 smd: 1(-3.625,4.225) 2(-3.625,3.575) 3(-3.625,2.925) 4(-3.625,2.275) 5(-3.625,1.625) 6(-3.625,0.975) 7(-3.625,0.325) 8(-3.625,-0.325) 9(-3.625,-0.975) 10(-3.625,-1.625) 11(-3.625,-2.275) 12(-3.625,-2.925) 13(-3.625,-3.575) 14(-3.625,-4.225) 15(3.625,-4.225) 16(3.625,-3.575) 17(3.625,-2.925) 18(3.625,-2.275) 19(3.625,-1.625) 20(3.625,-0.975) 21(3.625,-0.325) 22(3.625,0.325) 23(3.625,0.975) 24(3.625,1.625) 25(3.625,2.275) 26(3.625,2.925) 27(3.625,3.575) 28(3.625,4.225)
  silkscreen extent -3.75,-5.25 2.4,5.25, body extent -3.9,-5.25 3.9,5.25, height 2
"SUPERSEAL 60POS 90Deg" [mm]
  round 2.2 hole 1.3: A1(7.25,14.5) A2(10.25,14.5) A3(13.25,14.5) A4(16.25,14.5) A5(19.25,14.5) A6(22.25,14.5) A7(25.25,14.5) A8(28.25,14.5) A9(31.25,14.5) A10(8.75,12) A11(11.75,12) A12(14.75,12) A13(17.75,12) A14(20.75,12) A15(23.75,12) A16(26.75,12) A17(29.75,12) A18(8.75,9) A19(11.75,9) A20(14.75,9) A21(17.75,9) A22(20.75,9) A23(23.75,9) A24(26.75,9) A25(29.75,9) A26(7.25,6.5) A27(10.25,6.5) A28(13.25,6.5) A29(16.25,6.5) A30(19.25,6.5) A31(22.25,6.5) A32(25.25,6.5) A33(28.25,6.5) A34(31.25,6.5) B1(45.75,14.5) B2(48.75,14.5) B3(51.75,14.5) B4(54.75,14.5) B5(57.75,14.5) B6(60.75,14.5) B7(63.75,14.5) B8(47.25,12) B9(50.25,12) B10(53.25,12) B11(56.25,12) B12(59.25,12) B13(62.25,12) B14(47.25,9) B15(50.25,9) B16(53.25,9) B17(56.25,9) B18(59.25,9) B19(62.25,9) B20(45.75,6.5) B21(48.75,6.5) B22(51.75,6.5) B23(54.75,6.5) B24(57.75,6.5) B25(60.75,6.5) B26(63.75,6.5)
  round 3.3 hole 3.3: CH(38.5,0) LH(0,0) RH(71,0)
  silkscreen extent -3.5,-3.5 74.5,17, body extent -3.5,-19.5 74.5,17, height 28.15
TECO-1981568-5_V [mm] "SMD, 5-Leads, Body 8x5.9mm, Pitch 0.65mm"
  rect 0.4x1.35 smd: 1(-1.3,0) 2(-0.65,0) 3(0,0) 4(0.65,0) 5(1.3,0)
  rect 1.6x1.4 smd: 6(-3.2,-0.225) 7(3.2,-0.225)
  rect 1.45x1.3 smd: 8(-3.425,-2.675) 9(3.425,-2.675)
  rect 1.9x1.9 smd: 10(-1.2,-2.675) 11(1.2,-2.675)
  silkscreen extent -4,-5.63 4,1.12, body extent -4,-5.5 4,0.1, height 2.79
TO-277 [mm] "DFN, 3-Leads, Body 4.44x5.91mm, Pitch 3.68mm, IPC Medium Density, FSV20100V"
  rect 1.3x1.45 smd: 1(-2.794,1.016) 2(-2.794,-1.016)
  rect 4.9x4.15 smd: 3(0.913,0)
  silkscreen extent -3.12,2.67 -3.03,2.76, body extent -3.3,-2.31 3.56,2.32, height 1.2
TQFP64 [mm] "TSQFP, 64-Leads, Body 10.00x10.00mm, Pitch 0.50mm, IPC Medium Density, MKE18F512VLH16"
  rect 1.35x0.3 smd: 1(-5.75,3.75) 2(-5.75,3.25) 3(-5.75,2.75) 4(-5.75,2.25) 5(-5.75,1.75) 6(-5.75,1.25) 7(-5.75,0.75) 8(-5.75,0.25) 9(-5.75,-0.25) 10(-5.75,-0.75) 11(-5.75,-1.25) 12(-5.75,-1.75) 13(-5.75,-2.25) 14(-5.75,-2.75) 15(-5.75,-3.25) 16(-5.75,-3.75) 33(5.75,-3.75) 34(5.75,-3.25) 35(5.75,-2.75) 36(5.75,-2.25) 37(5.75,-1.75) 38(5.75,-1.25) 39(5.75,-0.75) 40(5.75,-0.25) 41(5.75,0.25) 42(5.75,0.75) 43(5.75,1.25) 44(5.75,1.75) 45(5.75,2.25) 46(5.75,2.75) 47(5.75,3.25) 48(5.75,3.75)
  rect 0.3x1.35 smd: 17(-3.75,-5.75) 18(-3.25,-5.75) 19(-2.75,-5.75) 20(-2.25,-5.75) 21(-1.75,-5.75) 22(-1.25,-5.75) 23(-0.75,-5.75) 24(-0.25,-5.75) 25(0.25,-5.75) 26(0.75,-5.75) 27(1.25,-5.75) 28(1.75,-5.75) 29(2.25,-5.75) 30(2.75,-5.75) 31(3.25,-5.75) 32(3.75,-5.75) 49(3.75,5.75) 50(3.25,5.75) 51(2.75,5.75) 52(2.25,5.75) 53(1.75,5.75) 54(1.25,5.75) 55(0.75,5.75) 56(0.25,5.75) 57(-0.25,5.75) 58(-0.75,5.75) 59(-1.25,5.75) 60(-1.75,5.75) 61(-2.25,5.75) 62(-2.75,5.75) 63(-3.25,5.75) 64(-3.75,5.75)
  silkscreen extent -5.87,-4.67 4.67,4.68, body extent -5,-5 5,5, height 1.6
XG8V-0331 [mm] "3 pin header"
  round 1.4 hole 0.8: 1(0,0) 2(2.54,0) 3(5.08,0)

## Part data
BRAKE_FRONT_POT BRAKE_REAR_POT FTDI_RED MCU N1: library part 1, Drawer_id=1, Manufacturer_id=1
  BRAKE_FRONT_POT BRAKE_REAR_POT: ComponentLink1Description=Datasheet, idTable=1, Link=https://www.digikey.com/product-detail/en/precision-electronics-corporation/RV6LAYSA502A/RV6L502C-ND/222820, Name=RV6LAYSA502A_rotary_pot
  FTDI_RED: idLED=1, Name=LED_0805_RED, Vf=0.7V
  MCU: idMCU=1, Name="MKE18F512VLH16 MCU"
  N1: idFuse=3, idShunt=1, Name="Net Tie"
C1_G C1_M: library part 943, Dielectric=Ceramic, Manufacturer_id=1, Package="CAP 0603/1608", Voltage_Rating=50V, Created_By="Nick Mah", Created_Date=10/20/2018, Drawer_id=1, idCapacitor=943, Name="Cap_0.10uf_50V_CAP 0603/1608"
C2_G C2_M: library part 929, Dielectric=Ceramic, Manufacturer_id=1, Package="CAP 0603/1608", Voltage_Rating=50V, Created_By="Nick Mah", Created_Date=10/20/2018, Drawer_id=1, idCapacitor=929, Name="Cap_4700pf_50V_CAP 0603/1608"
C3 C4: library part 355, Dielectric=Ceramic, Manufacturer_id=1, Package="CAP 0805/2012", Voltage_Rating=16V, Created_By="Nick Mah", Created_Date=10/20/2018, Drawer_id=1, idCapacitor=355, Name="Cap_10uf_16V_CAP 0805/2012"
C5: library part 223, Dielectric=Ceramic, Manufacturer_id=1, Package="CAP 0603/1608", Voltage_Rating=16V, Created_By="Nick Mah", Created_Date=10/20/2018, Drawer_id=1, idCapacitor=223, Name="Cap_0.10uf_16V_CAP 0603/1608"
C6 C7 C9 C10 C11: library part 583, Dielectric=Ceramic, Manufacturer_id=1, Package="CAP 0603/1608", Voltage_Rating=25V, Created_By="Nick Mah", Created_Date=10/20/2018, Drawer_id=1, idCapacitor=583, Name="Cap_0.10uf_25V_CAP 0603/1608"
C8: library part 529, Dielectric=Ceramic, Manufacturer_id=1, Package="CAP 0603/1608", Voltage_Rating=25V, Created_By="Nick Mah", Created_Date=10/20/2018, Drawer_id=1, idCapacitor=529, Name="Cap_100pf_25V_CAP 0603/1608"
C12 C13 C14 C15 C29: library part 343, Dielectric=Ceramic, Manufacturer_id=1, Package="CAP 0805/2012", Voltage_Rating=16V, Created_By="Nick Mah", Created_Date=10/20/2018, Drawer_id=1, idCapacitor=343, Name="Cap_0.10uf_16V_CAP 0805/2012"
C17 C18 C19 C20 C21 C22 C23 C30: library part 229, Dielectric=Ceramic, Manufacturer_id=1, Package="CAP 0603/1608", Voltage_Rating=16V, Created_By="Nick Mah", Created_Date=10/20/2018, Drawer_id=1, idCapacitor=229, Name="Cap_1.0uf_16V_CAP 0603/1608"
C24 C25 C26 C27 C28: library part 235, Dielectric=Ceramic, Manufacturer_id=1, Package="CAP 0603/1608", Voltage_Rating=16V, Created_By="Nick Mah", Created_Date=10/20/2018, Drawer_id=1, idCapacitor=235, Name="Cap_10uf_16V_CAP 0603/1608"
D1 D2 D3 D4 D5: library part 9, idDiode=9
D1_G D1_M: library part 7, "ESD Protection Diode", Manufacturer_id=1, Package=SOT-23, Power=350W, Supplier1PartNo=NUP1105LT1GOSCT-ND, ComponentLink1URL=https://www.digikey.com/product-detail/en/on-semiconductor/NUP1105LT1G/NUP1105LT1GOSCT-ND/2122067, Drawer_id=1, Ic=8A, idDiode=7, Link=https://www.digikey.com/product-detail/en/on-semiconductor/NUP1105LT1G/NUP1105LT1GOSCT-ND/2122067, MfrPartNo=NUP1105LT1G, Name=SOT-23_350W_Zener, Num_Circuits=1, Supplier1=Digikey, Type=Zener
D6: library part 10, "Zener Diode 14V 500mW �}5% Surface Mount SOD-123", Manufacturer_id=8, Package=SOD-123, Power=500mW, Supplier1PartNo=DDZ9701-7DICT-ND, ComponentLink1Description=Datasheet, ComponentLink1URL=https://www.diodes.com/assets/Datasheets/ds30410.pdf, Drawer_id=1, idDiode=10, Link=https://www.digikey.com/product-detail/en/diodes-incorporated/DDZ9701-7/DDZ9701-7DICT-ND/3877402, MfrPartNo=DDZ9701-7, Name=DDZ9701, Num_Circuits=1, Supplier1=Digi-Key, Type=Zener
D7: library part 11, Manufacturer_id=1, MfrPartNo=FSV20100V, Package=TO-277, Supplier1PartNo=FSV20100VCT-ND, ComponentLink1Description=Datasheet, ComponentLink1URL=https://www.fairchildsemi.com/datasheets/FS/FSV20100V.pdf, Drawer_id=1, idDiode=11, Link=https://www.digikey.com/product-detail/en/on-semiconductor/FSV20100V/FSV20100VCT-ND/5306682, Name=FSV20100V, Type=Schottky
D8 RVP_LED: library part 2, Manufacturer_id=1, Package=0805, Brightness=7mcd, Drawer_id=1, Id=20mA, idLED=2, Link=https://www.digikey.com/product-detail/en/visual-communications-company-vcc/CMD17-21VGD-TR8/L62505CT-ND/254936, Name=CMD17_0805_GREEN, Vf=2.1V
FLASH: library part 4, "2 row connector", Manufacturer_id=1, MfrPartNo=5103309-1, Voltage_Rating=None, ComponentLink1Description=Datasheet, Created_By=Aiku, Drawer_id=1, idConn=4, Link=https://www.digikey.com/product-detail/en/5103309-1/A33160-ND/1114898?utm_campaign=buynow&WT.z_cid=ref_octopart_dkc_buynow&utm_medium=aggregator&curr=usd&site=us&utm_source=octopart, Name=CONN_TE_2X5POS, Num_Contacts=10, Num_Rows=2, Pitch=2.54mm
FTDI: library part 3, Manufacturer_id=1, Created_By=Kyle, Drawer_id=1, idIC_Interface=3, Link=https://www.digikey.com/product-detail/en/ftdi-future-technology-devices-international-ltd/FT232RL-REEL/768-1007-1-ND/1836402, MfrPartNo=FT232RL, Name="USB FTDI", Protocol=UART, Vin(Max)=5.25, Vin(Min)=3.3
FTDI_GRN LATCH_RELAY: library part 2, Manufacturer_id=1, Drawer_id=1
  FTDI_GRN: Brightness=35mcd, Id=20mA, idLED=2, Name=LED_0805_GREEN, Vf=2V
  LATCH_RELAY: idRelay=2, Name="Relay JW2SN-DC12"
J1: library part 5, "USB Micro Type B", Manufacturer_id=1, MfrPartNo=1981568-1, ComponentLink1Description=Datasheet, Created_By=Aiku, Created_Date=10/20/2018, Drawer_id=1, idConn=5, Link=https://www.mouser.com/ProductDetail/TE-Connectivity-AMP/1981568-1?qs=sGAEpiMZZMulM8LPOQ%252bykzEIUPbUCiSfqsfxH3Oq%252bYo%3d, Name="TE USB Micro", Num_Contacts=5, Supplier1=TE
MC_PWR_SWITCH: library part 4, Manufacturer_id=1, MfrPartNo=M2011SS1W01_UC, Voltage_Rating="125 V", ComponentLink1Description=Datasheet, ComponentLink1URL=https://www.nkkswitches.com/pdf/MtogglesBushing.pdf, Drawer_id=1, idTable=4, Link=https://www.digikey.com/product-detail/en/nkk-switches/M2011SS1W01-UC/360-3289-ND/2105194, Name=M2011SS1W01_UC_SPST_Switch
"PTC Fuse": library part 4, "Fuse", Manufacturer_id=1, MfrPartNo=2920L200, Created_By="Eunice Bernardo", Created_Date=10/27/2018, Drawer_id=1, I-hold=F?, I_hold=2A, I_max=40A, I_trip=4A, idFuse=4, LatestRevisionDate=17-Jul-2002, LatestRevisionNote="Re-released for DXP Platform.", Link=https://www.digikey.com/product-detail/en/littelfuse-inc/2920L200-24DR/F2872TR-ND/1211346, Name="PTC Poly Fuse Resettable", PackageDescription="Thru-Hole; 2 Leads", PackageReference=PIN-W2/E2.8, Published=8-Jun-2000, Publisher="Altium Limited"
R1_G R1_M: library part 2293, Manufacturer_id=1, Package=0603, Power=1/10W, Tolerance=10%, ComponentLink1Description=Datasheet, Created_By="Nick Mah", Created_Date=2018-10-20, Drawer_id=1, idResistor=2293, Name=Res_100_0603_1/10W_10%, Supplier 1=Digi-Key
R2_G R2_M R3_G R3_M: library part 1340, Manufacturer_id=1, Package=0603, Power=1/10W, Tolerance=5%, ComponentLink1Description=Datasheet, Created_By="Nick Mah", Created_Date=2018-10-20, Drawer_id=1, idResistor=1340, Name=Res_62_0603_1/10W_5%, Supplier 1=Digi-Key
R4 R5 R10 R11: library part 1842, Manufacturer_id=1, Package=0805, Power=1/4W, Tolerance=5%, ComponentLink1Description=Datasheet, Created_By="Nick Mah", Created_Date=2018-10-20, Drawer_id=1, idResistor=1842, Name=Res_51k_0805_1/4W_5%, Supplier 1=Digi-Key
R6 R9: library part 1831, Manufacturer_id=1, Package=0805, Power=1/4W, Tolerance=5%, ComponentLink1Description=Datasheet, Created_By="Nick Mah", Created_Date=2018-10-20, Drawer_id=1, idResistor=1831, Name=Res_18k_0805_1/4W_5%, Supplier 1=Digi-Key
R7 R8: library part 1808, Manufacturer_id=1, Package=0805, Power=1/4W, Tolerance=5%, ComponentLink1Description=Datasheet, Created_By="Nick Mah", Created_Date=2018-10-20, Drawer_id=1, idResistor=1808, Name=Res_2.0k_0805_1/4W_5%, Supplier 1=Digi-Key
R12 R15 R18 R31: library part 545, Manufacturer_id=1, Package=0805, Power=1/10W, Tolerance=1%, ComponentLink1Description=Datasheet, Created_By="Nick Mah", Created_Date=2018-10-20, Drawer_id=1, idResistor=545, Name=Res_47k_0805_1/10W_1%, Supplier 1=Digi-Key
R13 R14 R16 R19 R20 R21 R22 R23 R24: library part 1625, Manufacturer_id=1, Package=0805, Power=1/10W, Tolerance=5%, ComponentLink1Description=Datasheet, Created_By="Nick Mah", Created_Date=2018-10-20, Drawer_id=1, idResistor=1625, Name=Res_47k_0805_1/10W_5%, Supplier 1=Digi-Key
R17 R26 R27 R28 R37 R38 R39 R40 R41 R42 R43 R44 R45 R46 R47 R48 R49 R50 R51 R52 R53 R54 R55 R56 R57 R58 R61 R62: library part 1841, Manufacturer_id=1, Package=0805, Power=1/4W, Tolerance=5%, ComponentLink1Description=Datasheet, Created_By="Nick Mah", Created_Date=2018-10-20, Drawer_id=1, idResistor=1841, Name=Res_47k_0805_1/4W_5%, Supplier 1=Digi-Key
R25: library part 706, Manufacturer_id=1, Package=0805, Power=1/4W, Tolerance=1%, ComponentLink1Description=Datasheet, Created_By="Nick Mah", Created_Date=2018-10-20, Drawer_id=1, idResistor=706, Name=Res_240_0805_1/4W_1%, Supplier 1=Digi-Key
R29: library part 2541, Manufacturer_id=1, Package=0805, Power=1/4W, Tolerance=10%, ComponentLink1Description=Datasheet, Created_By="Nick Mah", Created_Date=2018-10-20, Drawer_id=1, idResistor=2541, Name=Res_47k_0805_1/4W_10%, Supplier 1=Digi-Key
R30: library part 313, Manufacturer_id=1, Package=0603, Power=1/10W, Tolerance=1%, ComponentLink1Description=Datasheet, Created_By="Nick Mah", Created_Date=2018-10-20, Drawer_id=1, idResistor=313, Name=Res_10k_0603_1/10W_1%, Supplier 1=Digi-Key
R32: library part 497, Manufacturer_id=1, Package=0805, Power=1/10W, Tolerance=1%, ComponentLink1Description=Datasheet, Created_By="Nick Mah", Created_Date=2018-10-20, Drawer_id=1, idResistor=497, Name=Res_470_0805_1/10W_1%, Supplier 1=Digi-Key
R33 R34 R35 R36: library part 721, Manufacturer_id=1, Package=0805, Power=1/4W, Tolerance=1%, ComponentLink1Description=Datasheet, Created_By="Nick Mah", Created_Date=2018-10-20, Drawer_id=1, idResistor=721, Name=Res_1.0k_0805_1/4W_1%, Supplier 1=Digi-Key
R59: library part 744, Manufacturer_id=1, Package=0805, Power=1/4W, Tolerance=1%, ComponentLink1Description=Datasheet, Created_By="Nick Mah", Created_Date=2018-10-20, Drawer_id=1, idResistor=744, Name=Res_9.1k_0805_1/4W_1%, Supplier 1=Digi-Key
R60: library part 746, Manufacturer_id=1, Package=0805, Power=1/4W, Tolerance=1%, ComponentLink1Description=Datasheet, Created_By="Nick Mah", Created_Date=2018-10-20, Drawer_id=1, idResistor=746, Name=Res_11k_0805_1/4W_1%, Supplier 1=Digi-Key
T1: library part 3, "N-Channel 25V 100A (Tc) 106W (Tc) Surface Mount LFPAK56, Power-SO8", Manufacturer_id=6, MfrPartNo=PSMN2R2-25YLC,115, Package=LFPAK-SO8, Supplier1PartNo=1727-5299-1-ND, ComponentLink1Description=Datasheet, ComponentLink1URL=https://assets.nexperia.com/documents/data-sheet/PSMN2R2-25YLC.pdf, Created_By=Nick, Drawer_id=1, Id=100A, idFETs=3, Link=https://www.digikey.com/product-detail/en/nexperia-usa-inc/PSMN2R2-25YLC115/1727-5299-1-ND/2674299, Name=PSMN2R2, Num_Circuits=1, Rds_On=2.5mOhm, Supplier1=Digi-Key, Vdss=25V, Vgs(Max)=20V, Vgs(typ)=10V
TP1 TP2 TP3 TP4: library part 5, Manufacturer_id=1, Package=0603, ComponentLink1Description=Datasheet, ComponentLink1URL=https://www.te.com/commerce/DocumentDelivery/DDEController?Action=srchrtrv&DocNm=1773266&DocType=DS&DocLang=English, Drawer_id=1, idTable=5, Link=https://www.digikey.com/product-detail/en/te-connectivity-amp-connectors/RCU-0C/A106145CT-ND/3477802, MfrPartNo=RCU-0C, Name=RCU-0C_Test_Point
U1_G U1_M: library part 5, Manufacturer_id=1, MfrPartNo=MCP2561, Package=SOIC-8, Created_By="Angel Delgado", Data_Rate=1Mbps, Drawer_id=1, idIC_Interface=5, Link=https://www.digikey.com/product-detail/en/microchip-technology/MCP2561T-E-SN/MCP2561T-E-SNCT-ND/5148846, Name="CAN Transceiver", Num_Circuits=1, Protocol=CAN, Type=Transceiver, Vin(Max)=5.5V, Vin(Min)=4.5V
U2: library part 15, Manufacturer_id=1, Drawer_id=1, idIC_Misc=15, Name=74HC21D_AND_Gate
U3 U5 U6 U7: library part 7, Manufacturer_id=1, MfrPartNo=LT1018CS8#PBF, Drawer_id=1, idIC_Misc=7, Link=https://www.digikey.com/product-detail/en/linear-technology-analog-devices/LT1018CS8-PBF/LT1018CS8-PBF-ND/894434, Name="LT1018 Dual Comparator"
U4: library part 12, Manufacturer_id=1, Drawer_id=1, idIC_Misc=12, Name="SN74LVC2G132DCUR 2channel NAND Gate"
U8: library part 16, "Linear Voltage Regulator IC Positive Fixed 1 Output 5V 1A SOT-223", Current_Rating=1A, Dropout_Voltage="1.2V @ 800mA", Manufacturer_id=1, Package=SOT-223-3, ComponentLink1Description=Datasheet, ComponentLink1URL=https://www.onsemi.com/pub/Collateral/NCP1117-D.PDF, Created_By="Angel Delgado", Drawer_id=1, idPMIC_Lin=16, Link=https://www.digikey.com/product-detail/en/on-semiconductor/NCP1117ST50T3G/NCP1117ST50T3GOSCT-ND/1967217, MfrPartNo=NCP1117ST50T3G, Name="5V 1A LDO", Num_Outputs=1, Output_Config="5V Fixed", Vin(Max)=20V, Vout(Max)=5.05, Vout(Min)=4.95, Vout_Type=Fixed
U9: library part 30, Manufacturer_id=1, Drawer_id=1, idIC_Misc=30, Link=https://www.digikey.com/product-detail/en/texas-instruments/SN74LVC3G14DCUR/296-13006-1-ND/475831, Name="SN74LVC3G14DCUR Inverter"
U10 U11 U12 U13 U14: library part 6, "High Side Driver", Manufacturer_id=1, MfrPartNo=BTS716GXUMA1, ComponentLink1Description=Datasheet, ComponentLink1URL=https://www.infineon.com/dgdl/Infineon-BTS716G-DS-v01_00-EN.pdf?fileId=5546d4625a888733015aa3be86601004, Drawer_id=1, idIC_Misc=6, Link=https://www.digikey.com/product-detail/en/infineon-technologies/BTS716GXUMA1/BTS716GXUMA1CT-ND/520067, Name="BTS716G High Side Driver"
U15: library part 14, Manufacturer_id=1, Drawer_id=1, idIC_Misc=14, Name="SN74LVC1G32 OR GATE"
X1: library part 3, "90 Degree", Manufacturer_id=1, MfrPartNo=3-6437285-2, ComponentLink1Description=Datasheet, Drawer_id=1, idConn=3, Link=https://www.te.com/usa-en/product-3-6437285-2.html, Name="AMP Superseal 60POS 90Deg", Num_Contacts=60, Num_Rows=4, Pitch="3 mm"
X2 X3 X4 X5 X6 X7 X8 X9: library part 8, "3 pin header", Manufacturer_id=1, ComponentLink1Description=Datasheet, Drawer_id=1, idConn=8, Link=https://www.digikey.com/products/en/connectors-interconnects/rectangular-connectors-headers-male-pins/314?k=jumper&k=&pkeyword=jumper&pv88=5&sf=0&FV=ffe0013a&quantity=&ColumnSort=0&page=1&pageSize=25, Name=XG8V-0331_3pin_header, Num_Contacts=3, Pitch="2.54 mm"
Y1 Y2 Y3 Y4 Y5: library part 3, Coil_Voltage=12V, Manufacturer_id=1, Drawer_id=1, idRelay=3, LatestRevisionDate=17-Jul-2002, LatestRevisionNote="Re-released for DXP Platform.", Name=ACTP112, PackageReference=MODULE5B, Published=8-Jun-2000, Publisher="Altium Limited"

## Free pads (board coordinates)
  round 5 hole 3.3: 6(74.5,177) 7(172,177) 8(172,9) 9(74.5,9)

## Via types
v1: diameter 0.762, hole 0.381, Top Layer to Bottom Layer, 185 vias
v2: diameter 2.54, hole 1.24, Top Layer to Bottom Layer, 2 vias

## Nets (pads, with @x,y where several pads share a name; then routed paths per layer and width w, separated by ;. In a path a pad name is that pad's centre, name@x,y a point inside that pad or via, vN(x,y) a via of type N, cw(c..) or ccw(c..) an arc to the next point about the centre after c; other vN are vias at no path point)
0.5V: C12.2 R6.1 R8.2 U5.8 U6.8 | length 21.9
  Top Layer w0.381: U5.8@111.96,147.1 111.96,146.115 113.375,144.7 120.1,144.7 C12.2@121.1,145.7 121.1,147.6 121.825,148.325 R6.1@122.9,148.325 R8.2@125.4,148.325 126.075,148.325 127.195,147.205 U6.8@127.195,145.225
1: MCU.32 R14.2 X1.B1 X3.1 | length 142.1
  Top Layer w0.254: MCU.32@129.975,92.85 141.55,92.85 142.065,93.365 v1@151.365,93.365 ; v1(152.4,162) 161,162 171.3,151.7 171.3,110.2 174.3,107.2 174.3,93.9 171.1,90.7 163.4,90.7 X1.B1@158.7,95.4
  Top Layer w0.381: v1@151.365,93.365 v1(151.4,93.4)
  Bottom Layer w0.254: X3.1@142.4,164.16 148.74,164.16 150.9,162 v1(152.4,162) ; v1(151.4,93.4) R14.2@154.875,93.4 ; R14.2@155,93.425 156.725,93.425 X1.B1@158.7,95.4
  Bottom Layer w0.381: R14.2@154.875,93.4 R14.2@155.2,93.725
3: MCU.28 R20.2 X1.A34 | length 44.2
  Top Layer w0.254: MCU.28@129.975,90.85 v1@146.25,90.85
  Top Layer w0.381: v1@146.25,90.85 v1(146.3,90.9)
  Bottom Layer w0.254: v1(146.3,90.9) 148.4,90.9 149.6,92.1 158,92.1 159.575,90.525 R20.2@160.84,90.525 161.075,90.525 166.7,84.9 X1.A34@166.7,80.9
4: MCU.27 R22.2 X1.A25 | length 42.4
  Top Layer w0.254: MCU.27@129.975,90.35 145.65,90.35 146.1,89.9 v1(147.8,89.9)
  Bottom Layer w0.254: v1(147.8,89.9) 154.1,89.9 154.975,89.025 R22.2@156.5,89.025 160.775,89.025 164.2,85.6 X1.A25@164.2,79.4
4.5V: C13.2 R7.1 R9.2 U5.3 U6.3 | length 28.9
  Top Layer w0.381: U5.3@114.5,141.65 114.5,139.875 116.165,138.21 R9.2@116.165,137.675 R7.1@118.665,137.675 119.06,138.07 C13.2@119.06,140.255 119.06,141.46 119.4,141.8 122,141.8 122.55,141.25 122.55,138.825 125.426,135.949 128.549,135.949 129.735,137.135 U6.3@129.735,139.775
5: MCU.31 R13.1 U3.1 U5.1 U5.4 X1.A9 | length 166.6
  Top Layer w0.254: MCU.31@129.975,92.35 142.05,92.35 142.55,92.85 150.05,92.85 153.1,89.8 v1(153.1,86.6) ; X1.A9@158.7,80.9 160.5,82.7 168.9,82.7 171.1,84.9 v1(171.1,89.3)
  Top Layer w0.381: U5.1@111.96,141.65 111.96,142.66 112.5,143.2 115.33,143.2 115.77,142.76 U5.4@115.77,141.65 115.77,140.73 116.1,140.4 116.85,140.4 117.6,141.15 117.6,141.9 v1(118.6,142.9) ; U3.1@135.695,139.775 135.735,139.735 v1(135.735,138.4)
  Bottom Layer w0.254: v1(135.735,138.4) 158,138.4 170.6,125.8 170.6,104.7 174,101.3 174,92.2 v1(171.1,89.3) ; v1@153.2,86.6 155.175,84.625 R13.1@155.175,82.8 157.075,80.9 X1.A9@158.7,80.9
  Bottom Layer w0.381: v1(118.6,142.9) 122.3,142.9 126.8,138.4 v1(135.735,138.4) ; v1(153.1,86.6) v1@153.2,86.6
6: MCU.30 R16.1 U3.3 U6.1 U6.4 X1.A17 | length 156.4
  Top Layer w0.254: MCU.30@129.975,91.85 142.485,91.85 142.835,92.2 148.5,92.2 v1(151.7,89) 151.7,86.3 152.7,85.3 166.2,85.3 v1(169.9,89) ; v1@138.235,137.065 U3.3@138.235,139.775
  Top Layer w0.381: U6.1@127.195,139.775 127.195,140.695 127.7,141.2 130.5,141.2 131.005,140.695 U6.4@131.005,139.775 131.78,139 132.9,139 135,141.1 137.4,141.1 138.235,140.265 U3.3@138.235,139.775
  Bottom Layer w0.254: v1(138.3,137.3) 157.4,137.3 169.8,124.9 169.8,104.5 173.5,100.8 173.5,92.8 169.7,89 v1(169.9,89) ; v1(151.7,89) 154,89 158.475,84.525 R16.1@161.2,84.525 X1.A17@161.2,79.4
7: MCU.29 R23.1 X1.A8 | length 38.4
  Top Layer w0.254: MCU.29@129.975,91.35 142.9,91.35 143.15,91.6 147.6,91.6 v1@149.8,89.4
  Top Layer w0.381: v1(149.8,89.1) v1@149.8,89.4
  Bottom Layer w0.254: v1@150.1,89.1 151.1,88.1 151.1,82.4 152.4,81.1 153.2,81.1 155.175,79.125 R23.1@155.175,78.4 155.675,77.9 X1.A8@158.7,77.9
  Bottom Layer w0.381: v1(149.8,89.1) v1@150.1,89.1
8: MCU.23 R19.1 X1.A16 | length 46
  Top Layer w0.254: MCU.23@129.975,88.35 145.335,88.35 145.985,87.7 v1(147.1,87.7)
  Bottom Layer w0.254: v1(147.1,87.7) 147.1,77.5 152.2,72.4 154.5,72.4 155.175,73.075 ; R19.1@155.175,74 157.575,76.4 X1.A16@161.2,76.4
  Bottom Layer w0.381: 155.175,73.075 R19.1@155.175,74
9: MCU.24 R21.1 X1.A15 | length 42.5
  Top Layer w0.254: MCU.24@129.975,88.85 147.15,88.85 149.35,86.65 R21.1@149.35,82.6 149.35,78.45 154.4,73.4 X1.A15@161.2,73.4
  Bottom Layer w0.381: X1.A15@161.2,73.4 X1.A15@161.248,73.4
10: MCU.22 R24.1 X1.A14 | length 44.5
  Top Layer w0.254: MCU.22@129.975,87.85 144.65,87.85 145.6,86.9 v1(146.2,86.9)
  Bottom Layer w0.254: v1(146.2,86.9) 146.2,77.5 152.1,71.6 153.275,71.6 R24.1@155.175,69.7 156.6,69.7 157.3,70.4 X1.A14@161.2,70.4
+12: "PTC Fuse.2" C3.2 C26.2 C27.2 C28.2 D6.2 D7.3 R26.2 R27.2 R28.2 R37.2 R38.2 RVP_LED.1 T1.mb U8.3 U12.1 U12.10 U12.11 U12.12 U12.15 U12.16 U12.19 U12.20 U13.1 U13.10 U13.11 U13.12 U13.15 U13.16 U13.19 U13.20 U14.1 U14.10 U14.11 U14.12 U14.15 U14.16 U14.19 U14.20 X1.B22 X4.3 X5.3 X6.3 X7.3 X8.3 Y1.COM | length 456.9
  Top Layer w0.381: v1(105.7,115.8) 111.3,110.2 114.275,110.2 C28.2@115.475,109 U14.1@118.08,109 U14.20@118.08,118.35 U14.19@119.35,118.35 119.35,117.25 119.9,116.7 122.7,116.7 123.16,117.16 U14.16@123.16,118.35 U14.15@124.43,118.35 124.43,117.12 124.85,116.7 127.815,116.7 128.24,117.125 U14.12@128.24,118.35 U14.11@129.51,118.35 ; U14.10@129.51,109 U14.11@129.51,118.35 ; C3.2@141.5,122.855 141.5,121.2 140.7,120.4 130.2,120.4 129.51,119.71 U14.11@129.51,118.35
  Top Layer w0.543: X8.3@90.435,48.3 90.435,51.635 R38.2@90.5,51.7 90.5,53.3 91.5,54.3 100.35,54.3 101.35,53.3 R37.2@101.35,51.8 101.385,51.765 X7.3@101.385,48.4 ; X6.3@112.135,48.4 112.135,51.41 R28.2@112.525,51.8 112.525,52.835 113.29,53.6 121.935,53.6 122.935,52.6 X5.3@122.935,48.3 ; X4.3@133.735,48.1 133.735,51.535 R26.2@133.9,51.7 ; C3.2@141.5,122.855 141.545,122.9 U8.3@144.35,122.9 v1(150.75,116.5) v1(166.4,116.5) ; v1@142.706,46.694 v1(142.7,46.694) v1(145.294,44.1)
  Top Layer w2.43: Y1.COM@134.125,30.8 139.725,25.2 154.1,25.2 v2(154.2,25.3) 155.825,26.925 D7.3@155.825,31.2 T1.mb@155.825,37.5 161.4,37.5 ; D6.2@157.8,42 159.9,42 161.4,40.5 161.4,37.5 ; RVP_LED.1@161.375,33 161.4,33.025 161.4,37.5 ; X1.B22@166.7,101.4 168.7,101.4 170.5,99.6 170.5,94.6 168.3,92.4 v2(167,92.4)
  Bottom Layer w0.381: C27.2@91.825,118.1 94.21,118.1 U13.10@94.235,118.125 U13.11@94.235,127.475 U13.12@95.505,127.475 95.505,126.42 96.025,125.9 99,125.9 99.315,126.215 U13.15@99.315,127.475 U13.16@100.585,127.475 100.585,126.215 100.9,125.9 103.985,125.9 104.395,126.31 U13.19@104.395,127.475 U13.20@105.665,127.475 U13.1@105.665,118.125 105.665,115.835 v1(105.7,115.8) ; U12.1@133.225,102.585 U12.20@142.575,102.585 U12.19@142.575,103.855 141.445,103.855 140.8,104.5 140.8,106.9 141.565,107.665 U12.16@142.575,107.665 U12.15@142.575,108.935 141.365,108.935 140.7,109.6 140.7,111.9 141.545,112.745 U12.12@142.575,112.745 U12.11@142.575,114.015 U12.10@133.225,114.015 133.25,114.04 C26.2@133.25,116.3
  Bottom Layer w0.543: X7.3@101.385,48.4 101.385,48.485 102.8,49.9 107.38,49.9 108.88,48.4 X6.3@112.135,48.4 ; X5.3@122.935,48.3 123.14,48.3 124.94,50.1 128.949,50.1 130.949,48.1 X4.3@133.735,48.1 134.497,48.1 135.897,49.5 139.894,49.5 v1(142.7,46.694) ; C26.2@133.25,116.3 133.25,117.55 134.7,119 148.25,119 v1(150.75,116.5) ; Y1.COM@134.125,30.8 145.294,41.969 v1(145.294,44.1) ; v1(166.4,116.5) 167.8,116.5 169.1,115.2 169.1,103.8 X1.B22@166.7,101.4
  Bottom Layer w2.43: v2(154.2,25.3) 154.2,33.7 157.7,37.2 157.7,39.4 173.2,54.9 173.2,82.3 167,88.5 v2(167,92.4)